# EAGLE board MySLipo_v2.0 (EAGLE 9.2.2)
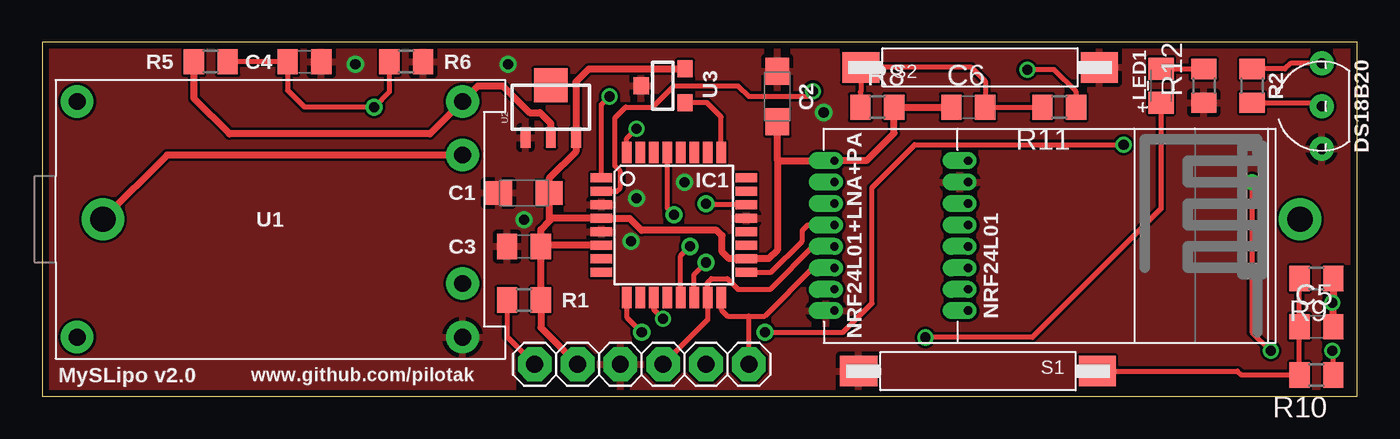
[diagram p0: board, top side]
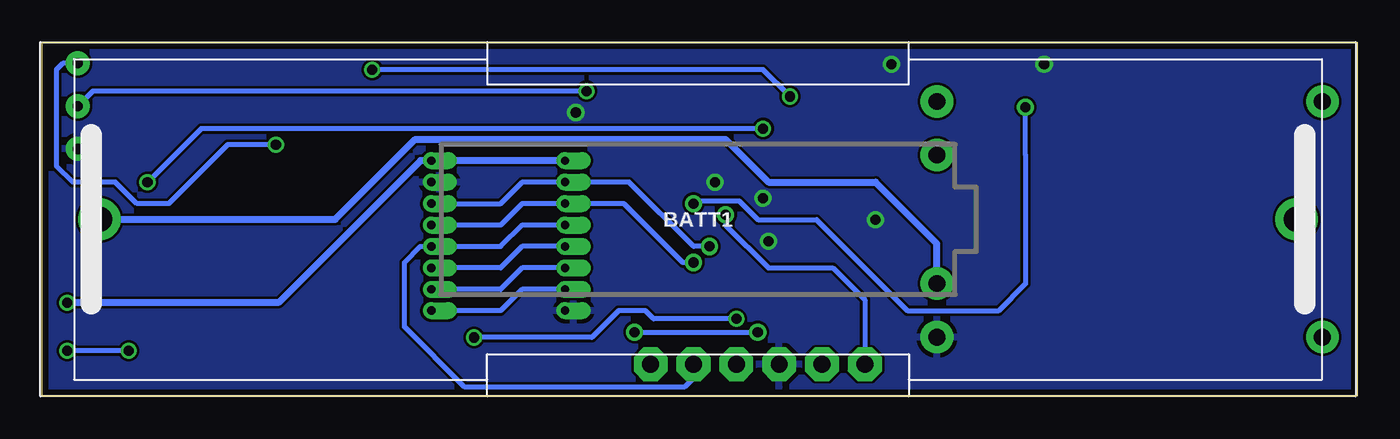
[diagram p1: board, bottom side, seen from below]

Size 78 x 21 mm. Coordinates in mm from the lower left corner, seen from the top.
Outline: 0,0 78,0 78,21 0,21 0,0
Copper layers (1*16): Top 0.0356mm / dielectric 1.5011mm / Bottom 0.0356mm
Design rules "PCBs_io": minimum track width 6mil, minimum drill 13mil, track to track 6mil, track to pad 6mil, pad to pad 6mil, via to via 6mil, smd to smd 6mil, copper to edge 15mil, drill to drill 6mil, minimum pad ring 7mil, minimum via ring 7mil, stop-mask expansion 3mil, vias tented up to drill 0.6mm, thermal gap 10mil

## Footprints (pad centres in the part's own frame; a part is rotated, then mirrored left to right if it is on the bottom)
18650_HOLDER = drill 1.5 pad 2.5: + 35.5,0; - -35.5,0
SMC_A = smd 1.6 x 1.4: + -1.5,0; - 1.5,0
C0805 = smd 1.2 x 1.5: 1 -1,0; 2 1,0
TO-92-WIDE_OPEN = drill 0.6 pad 1.422: D -2.54,0; G 0,0; S 2.54,0
TQFP32-08 = smd 1.27 x 0.559: 1 -4.293,2.8; 2 -4.293,2; 3 -4.293,1.2; 4 -4.293,0.4; 5 -4.293,-0.4; 6 -4.293,-1.2; 7 -4.293,-2; 8 -4.293,-2.8; 17 4.293,-2.8; 18 4.293,-2; 19 4.293,-1.2; 20 4.293,-0.4; 21 4.293,0.4; 22 4.293,1.2; 23 4.293,2; 24 4.293,2.8 | smd 0.559 x 1.27: 9 -2.8,-4.293; 10 -2,-4.293; 11 -1.2,-4.293; 12 -0.4,-4.293; 13 0.4,-4.293; 14 1.2,-4.293; 15 2,-4.293; 16 2.8,-4.293; 25 2.8,4.293; 26 2,4.293; 27 1.2,4.293; 28 0.4,4.293; 29 -0.4,4.293; 30 -1.2,4.293; 31 -2,4.293; 32 -2.8,4.293
LED_0805 = smd 1.3 x 1.5: 1 -1,0; 2 1,0
WIRELESS-NRF24L01-SMD-2 = drill 0.5 pad 1.016 offset: 1 1.905,0; 2 1.905,1.27; 3 1.905,2.54; 4 1.905,3.81; 5 1.905,5.08; 6 1.905,6.35; 7 1.905,7.62; 8 1.905,8.89
WIRELESS-NRF24L01-PA-SMD = drill 0.5 pad 1.016 offset: 1 0.635,1.905; 2 0.635,3.175; 3 0.635,4.445; 4 0.635,5.715; 5 0.635,6.985; 6 0.635,8.255; 7 0.635,9.525; 8 0.635,10.795
PROG = drill 1 pad 2 octagon: 1 -6.35,0; 2 -3.81,0; 3 -1.27,0; 4 1.27,0; 5 3.81,0; 6 6.35,0
R0805 = smd 1.2 x 1.5: 1 -1,0; 2 1,0
15X = smd 2.2 x 1.8: P$1 -7.012,0; P$2 7.139,0
USB_CHARGER = drill 1 pad 1.93: B+ -3.81,11.43; B- 3.81,11.43; IN+ -6.985,-11.43; IN- 6.985,-11.43; OUT+ -6.985,11.43; OUT- 6.985,11.43
SOT89 = smd 0.58 x 1.2: 1 -1.5,-1.8; 2 0,-1.8; 3 1.5,-1.8 | smd 2 x 2: 4 0,1.3
SOT23-3 = smd 1 x 0.9: 1 -1,-1.3; 2 1,-1.3; 3 0,1.3

## Placement (x,y rotation side)
BATT1  LI-PO_18650  [18650_HOLDER]  39.1,10.5 0 bottom
C1  10uF  [SMC_A]  28.57,12.06 180 top
C2  10uF  [SMC_A]  43.6,17.78 90 top
C3  100n  [C0805]  28.57,8.89 180 top
C4  100n  [C0805]  15.56,19.84 0 top
C5  100n  [C0805]  75.56,4.13 0 top
C6  100n  [C0805]  54.93,17.14 0 top
DS18B20  DS18B20TO-92-WIDE_OPEN  [TO-92-WIDE_OPEN]  75.88,17.21 90 top
IC1  ATMEGA328  [TQFP32-08]  37.47,10.16 0 top
LED1  yellow  [LED_0805]  66.36,18.41 90 top
NRF24L01  [WIRELESS-NRF24L01-SMD-2]  53.02,5.08 0 top
NRF24L01+LNA+PA  [WIRELESS-NRF24L01-PA-SMD]  46.35,3.17 0 top
PROG  [PROG]  35.56,1.91 0 top
R1  10K  [R0805]  28.57,5.71 0 top
R2  4K7  [R0805]  71.75,18.41 90 top
R5  1M  [R0805]  10,19.84 0 top
R6  330K  [R0805]  21.59,19.84 180 top
R8  1M  [R0805]  49.53,17.14 0 top
R9  1M  [R0805]  75.56,6.99 180 top
R10  10K  [R0805]  75.56,1.27 180 top
R11  10K  [R0805]  60.33,17.14 180 top
R12  1K2  [R0805]  68.9,18.41 90 top
S1  MEDER  [15X]  55.56,1.5 180 top
S2  MEDER  [15X]  55.56,19.5 0 top
U1  USB_CHARGER  [USB_CHARGER]  13.51,10.5 270 top
U2  HT7333  [SOT89]  30.16,17.14 0 top
U3  ATSHA204A  [SOT23-3]  36.83,18.41 90 top

## Library data of the parts
BATT1 DS18B20 IC1 PROG S1 S2 U1 = moje
C1-C6 R1 R2 R5 R6 R8-R12 = rcl
LED1 U3 = mysensors
NRF24L01 NRF24L01+LNA+PA = nrf24l01plus
U2 = my-power

## Nets
1-WIRE: DS18B20.G IC1.2 R2.1
1-WIRE_SUPPLY: DS18B20.S IC1.9 R2.2
+3V3: C1.+ C2.+ C3.1 C5.2 C6.1 IC1.4 IC1.6 IC1.18 NRF24L01+LNA+PA.8 NRF24L01.8 PROG.2 R1.2 R8.2 R9.1 U2.3 U3.2
+BATT: BATT1.+ U1.B+
CE: IC1.13 NRF24L01+LNA+PA.7 NRF24L01.6
CRYPT: IC1.25 U3.1
CSN: IC1.14 NRF24L01+LNA+PA.6 NRF24L01.5
D2: IC1.32 R10.1
D3: IC1.1 R11.1
D7: IC1.11 LED1.1
GND: C1.- C2.- C3.2 C4.2 DS18B20.D IC1.3 IC1.5 IC1.21 NRF24L01+LNA+PA.1 NRF24L01.7 PROG.3 R6.1 R12.1 S1.P$2 S2.P$2 U1.OUT- U2.1 U3.3
MISO: IC1.16 NRF24L01+LNA+PA.3 NRF24L01.2 PROG.6
MOSI: IC1.15 NRF24L01+LNA+PA.4 NRF24L01.3 PROG.4
N$1: NRF24L01+LNA+PA.2 NRF24L01.1
N$2: C5.1 R9.2 R10.2 S1.P$1
N$3: C6.2 R8.1 R11.2 S2.P$1
N$9: BATT1.- U1.B-
N$17: LED1.2 R12.2
RESET: IC1.29 PROG.1 R1.1
SCK: IC1.17 NRF24L01+LNA+PA.5 NRF24L01.4 PROG.5
VBATT: C4.1 IC1.22 R5.2 R6.2
VCC: R5.1 U1.OUT+ U2.2

## Tracks (layer width: path | path; a pad name or v marks a point on that pad's centre or on a via)
1-WIRE  (via drill 0.6)
  Top 0.305: IC1.2 34.07,12.16 34.29,12.38 34.29,13.34 33.97,13.65 33.97,16.51 34.61,17.14 36.2,17.14 37.47,18.41 41.27,18.41 41.91,17.78 45.4,17.78 v45.72,18.1 | R2.1 75.67,17.41 DS18B20.G
  Bottom 0.305: v45.72,18.1 74.99,18.1 DS18B20.G
1-WIRE_SUPPLY  (via drill 0.6, 0.6 pad 1.02)
  Top 0.305: IC1.9 34.66,4.71 v35.56,3.81 | v42.86,3.81 47.5,3.81 49.21,5.52 49.21,12.38 51.75,14.92 v64.14,14.92 | R2.2 73.71,19.41 74.04,19.75 DS18B20.S
  Bottom 0.305: v42.86,3.81 v35.56,3.81 | v64.14,14.92 66.99,14.92 70.48,11.43 72.39,11.43 73.66,12.7 76.2,12.7 77.15,13.65 77.15,19.37 76.77,19.75 DS18B20.S
+3V3  (via drill 0.6)
  Top 0.406: C3.1 R1.2 29.57,4.08 PROG.2 | C3.1 29.57,9.89 30.07,10.39 | 30.07,10.39 C1.+ 30.07,12.93 31.66,14.52 U2.3 31.66,18.64 32.43,19.41 U3.2 | 30.07,10.39 30.25,10.56 IC1.4 34.84,10.56 35.56,9.84 40.01,9.84 40.32,9.53 40.32,8.57 40.73,8.16 IC1.18 43.09,8.16 43.6,8.68 43.6,14.03 | IC1.6 29.64,8.96 C3.1 | 43.6,14.03 C2.+ | 43.6,14.03 43.66,13.97 NRF24L01+LNA+PA.8 48.9,13.97 50.53,15.61 R8.2 C6.1 | R9.1 76.56,5.6 v76.52,5.56 76.56,5.51 C5.2
  Bottom 0.406: v76.52,5.56 63.98,5.56 55.56,13.97 NRF24L01.8 NRF24L01+LNA+PA.8
+BATT
  Top 0.406: BATT1.+ 7.42,14.31 U1.B+
CE  (via drill 0.6 pad 1.02)
  Top 0.3: IC1.13 37.87,8.34 v38.42,8.89
  Bottom 0.305: v38.42,8.89 39.37,8.89 43.18,12.7 NRF24L01+LNA+PA.7 49.53,12.7 50.8,11.43 NRF24L01.6
CRYPT
  Top 0.305: U3.1 39.42,17.41 40.27,16.57 IC1.25
CSN  (via drill 0.6 pad 1.02)
  Top 0.3: IC1.14 38.66,7.23 v39.37,7.94
  Bottom 0.305: NRF24L01.5 50.8,10.16 49.53,11.43 NRF24L01+LNA+PA.6 43.5,11.43 40.01,7.94 v39.37,7.94
D2  (via drill 0.6)
  Top 0.305: IC1.32 34.66,15.3 v35.24,15.88 | R10.1 76.56,2.65 v76.52,2.7 | v71.75,12.7 71.75,3.81 v72.87,2.7
  Bottom 0.305: v35.24,15.88 68.58,15.88 v71.75,12.7 | v72.87,2.7 v76.52,2.7
D3  (via drill 0.6)
  Top 0.305: IC1.1 33.17,17.3 v33.66,17.78 | R11.1 61.33,18.05 60.01,19.37 v58.42,19.37
  Bottom 0.305: v33.66,17.78 35.24,19.37 v58.42,19.37
D7  (via drill 0.6)
  Top 0.305: 58.73,3.49 v52.39,3.49 | 58.73,3.49 58.74,3.49 | IC1.11 36.27,5.16 v36.83,4.59 | LED1.1 66.36,11.12 58.73,3.49
  Bottom 0.305: v36.83,4.59 41.74,4.59 42.23,5.08 43.81,5.08 45.4,3.49 v52.39,3.49
GND  (via drill 0.6 pad 1.02)
  other vias: 35.24,11.75 34.92,9.21 28.57,10.48 27.62,19.68 18.57,19.68 46.35,16.83 38.1,12.7
  pour Bottom: 0,0 0,21.59 78.74,21.59 78.74,0
  pour Top: 0,0 0,21.59 78.74,21.59 78.74,0
MISO
  Top 0.305: 41.91,4.76 40.64,4.76 40.27,5.14 IC1.16 | PROG.6 41.91,4.76 | 41.91,4.76 42.86,4.76 45.72,7.62 NRF24L01+LNA+PA.3
  Bottom 0.305: NRF24L01+LNA+PA.3 49.53,7.62 50.8,6.35 NRF24L01.2
MOSI
  Top 0.305: PROG.4 39.47,4.54 IC1.15 39.47,6.76 39.69,6.99 40.64,6.99 41.27,6.35 43.18,6.35 45.72,8.89 NRF24L01+LNA+PA.4
  Bottom 0.305: NRF24L01+LNA+PA.4 49.53,8.89 50.8,7.62 NRF24L01.3
N$1
  Bottom 0.305: NRF24L01+LNA+PA.2 49.53,6.35 50.8,5.08 NRF24L01.1
N$2
  Top 0.305: S1.P$1 70.89,1.5 71.12,1.27 R10.2 C5.1 R9.2
N$3
  Top 0.305: R11.2 C6.2 55.93,18.68 55.11,19.5 S2.P$1 48.55,18.07 48.53,18.05 R8.1
N$9
  Bottom 0.406: U1.B- 24.93,9.06 28.57,12.7 34.92,12.7 37.47,15.24 55.88,15.24 60.62,10.5 BATT1.-
N$13
  cutout Top: 28.89,1.27 28.26,1.27 28.26,0.32 28.89,0.32
N$17
  Top 0.305: LED1.2 R12.2
RESET  (via drill 0.6 pad 1.02)
  Top 0.305: IC1.29 37.06,11.17 v37.47,10.77 | R1.1 27.57,3.54 PROG.1
  Bottom 0.305: v37.47,10.77 37.47,10.16 34.92,7.62 31.11,7.62 29.21,5.71 PROG.1
SCK
  Top 0.305: IC1.17 43.24,7.36 45.09,9.21 45.09,9.84 45.4,10.16 NRF24L01+LNA+PA.5
  Bottom 0.3: 39.37,1.08 39.91,0.55
  Bottom 0.305: PROG.5 39.37,1.08 | NRF24L01+LNA+PA.5 49.53,10.16 50.8,8.89 NRF24L01.4 55.56,8.89 56.52,7.94 56.52,4.13 52.94,0.55 39.91,0.55
VBATT  (via drill 0.6 pad 1.02)
  Top 0.305: IC1.22 39.44,11.36 v39.37,11.43 | R6.2 20.59,18.05 v19.68,17.14 15.56,17.14 14.56,18.14 C4.1 R5.2
  Bottom 0.305: v19.68,17.14 19.68,14.31 19.68,14.28 19.68,6.67 21.27,5.08 26.67,5.08 32.07,10.48 35.56,10.48 36.67,11.59 39.21,11.59 v39.37,11.43
VCC
  Top 0.406: R5.1 9,17.67 11.11,15.56 23.01,15.56 U1.OUT+ 25.85,18.4 27.32,18.4 28.89,16.83 29.53,16.83 30.16,16.19 U2.2

## Text on the board
tValues: R | V | G | O | C | I
tSilk: MySLipo v2.0 | www.github.com/pilotak